# Altium PCB Left_Board.PcbDoc (part 2 of 2)
Units mm, origin at the board's own origin, x right, y up, seen from the top; angles counter-clockwise.
Board outline 34.7 x 82.01 mm, 6 copper layers (Top Layer, Layer 2, Layer 3, Layer 4, Layer 5, Bottom Layer), stack 1.538 mm thick; 59 components, 53 nets, 244 pads, 250 vias.
Unrouted connection lines stored in the file: 175.
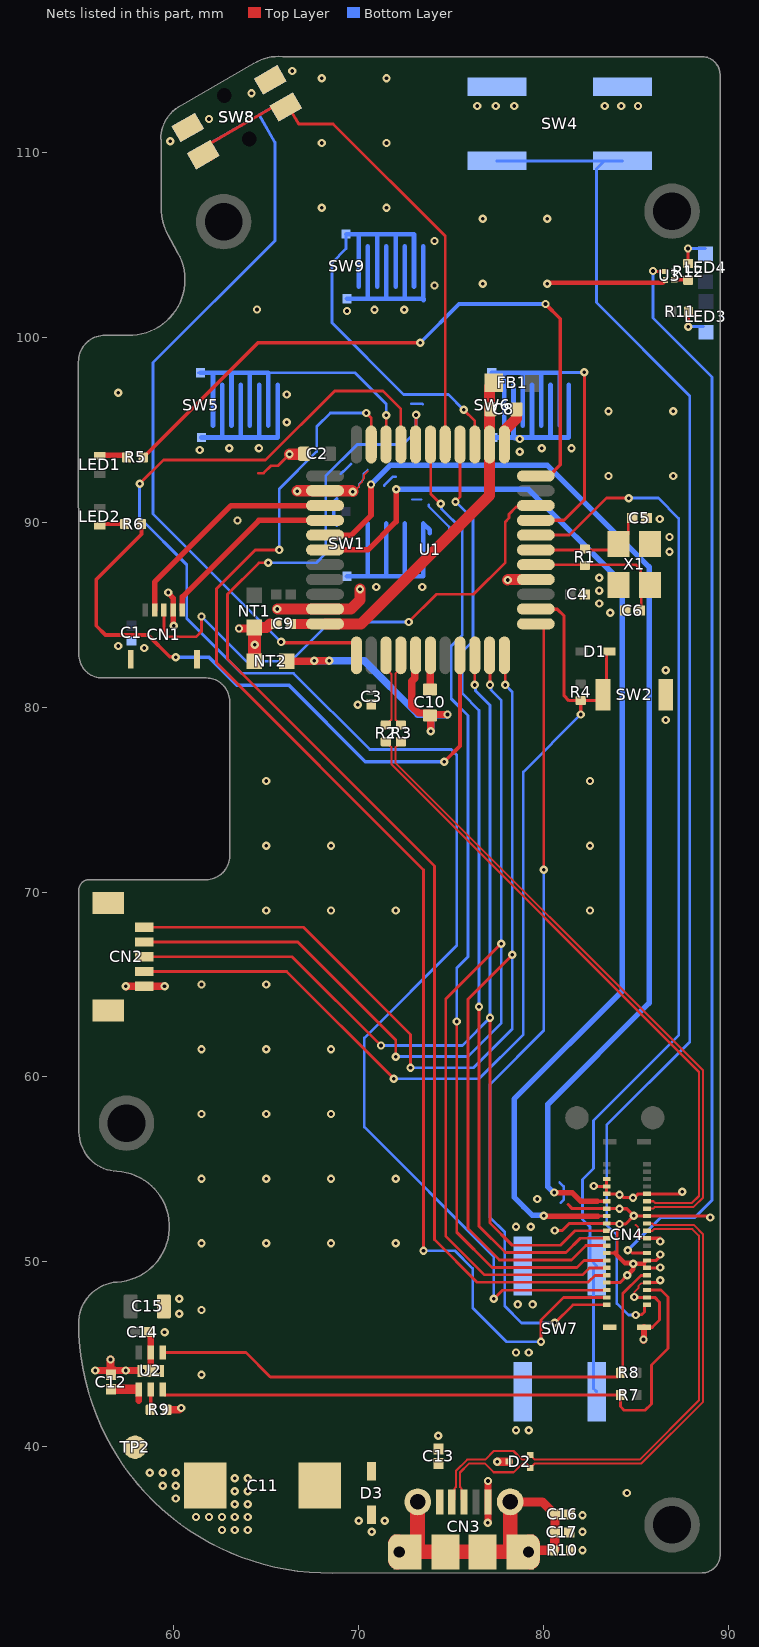
[diagram p6: the nets of this part, all layers, seen from the top]

## Via types
v1: diameter 0.45, hole 0.2, Top Layer to Bottom Layer, tented both sides, 248 vias
v2: diameter 0.45, hole 0.2, Top Layer to Bottom Layer, 2 vias

## Nets (pads, with @x,y where several pads share a name; then routed paths per layer and width w, separated by ;. In a path a pad name is that pad's centre, name@x,y a point inside that pad or via, vN(x,y) a via of type N, cw(c..) or ccw(c..) an arc to the next point about the centre after c; other vN are vias at no path point) (continued)
ATVCC: C8.1 C9.1 FB1.1 U1.24 U1.44 | length 19.8
  Top Layer w0.54: C9.1@66.35,84.5 U1.44@68.175,84.5
  Top Layer w0.6: U1.44@68.175,84.5 70.128,84.5 77.075,91.447 U1.24@77.075,94.2 77.075,96.1 77.075,97.325 FB1.1@77.3,97.55
B: SW5.1 U1.31 | length 11.1
  Top Layer w0.15: U1.31@71.475,94.2 71.487,94.213 v1(71.487,95.787)
  Bottom Layer w0.15: SW5.1@61.315,98.077 61.99,98.077 ; 62.99,98.077 63.99,98.077 ; 64.99,98.077 65.115,98.077 69.802,98.077 71.487,96.392 v1(71.487,95.787)
DOWN: CN4.32 U1.29 | length 68.7
  Top Layer w0.15: v1(65.1,87.8) 64.6,87.8 62.9,86.1 62.9,82.6 74.1,71.4 74.1,51.2 76.4,48.9 82.4,48.9 82.768,49.268 83.394,49.268 CN4.32@83.404,49.278 ; U1.29@73.075,94.2 73.1,94.225 v1(73.1,95.8)
  Bottom Layer w0.15: v1(65.1,87.8) 67.7,87.8 68.209,88.309 68.209,92.491 69.918,94.2 72.4,94.2 73.1,94.9 v1@73.1,95.724
E1_N: CN3.2 CN4.19 D2.2 | length 29
  Top Layer w0.112: CN3.2@75.038,37.021 75.182,37.165 75.182,37.752 75.258,37.828 75.258,38.699 75.866,39.307 76.832,39.307 77.3,39.775 78.365,39.775 78.833,39.307 79.09,39.307 79.156,39.373 79.156,39.441 79.265,39.55 D2.2@79.28,39.55 79.522,39.308 85.196,39.308 88.393,42.505 88.393,51.421 88.043,51.771 85.964,51.771 85.871,51.678 CN4.19@85.584,51.678
E1_P: CN3.3 CN4.17 D2.1 | length 29.4
  Top Layer w0.112: CN3.3@75.688,37.021 75.544,37.165 75.544,37.752 75.472,37.824 75.472,38.61 75.955,39.093 76.832,39.093 77.3,38.625 78.375,38.625 78.843,39.093 79.09,39.093 79.156,39.027 79.156,38.959 79.265,38.85 D2.1@79.28,38.85 79.524,39.094 85.285,39.094 88.607,42.416 88.607,51.51 88.132,51.985 85.964,51.985 85.871,52.078 CN4.17@85.584,52.078
FLT: CN4.35 R7.1 U2.3 | length 35
  Top Layer w0.15: U2.3@59.4,43.1 59.4,42.9 59.5,42.8 59.588,42.8 R7.1@84.15,42.8 84.15,42.175 84.35,41.975 85.475,41.975 85.825,42.325 85.825,44.425 86.716,45.316 86.716,48.105 86.343,48.478 CN4.35@85.584,48.478
GD0_N: R2.2 U1.3 | length 4
  Top Layer w0.112: R2.2@71.462,79.025 71.483,79.025 71.677,79.219 71.677,79.24 71.768,79.331 71.768,81.782 71.475,82.075 U1.3@71.475,82.8
GD0_P: R3.2 U1.4 | length 4
  Top Layer w0.112: U1.4@72.275,82.8 72.275,82.089 71.982,81.796 71.982,79.33 72.072,79.24 72.072,79.219 72.266,79.025 R3.2@72.287,79.025
GD_N: CN4.11 R2.1 | length 34.6
  Top Layer w0.112: R2.1@71.462,78.125 71.483,78.125 71.677,77.931 71.677,77.91 71.767,77.82 71.767,76.9 88.398,60.27 88.398,53.564 88.022,53.188 86.019,53.188 85.929,53.278 CN4.11@85.584,53.278
GD_P: CN4.13 R3.1 | length 35
  Top Layer w0.112: R3.1@72.287,78.125 72.266,78.125 72.072,77.931 72.072,77.91 71.981,77.819 71.981,76.989 88.612,60.358 88.612,53.475 88.111,52.974 86.019,52.974 85.923,52.878 CN4.13@85.584,52.878
GND: C1.2 C2.2 C3.2 C4.2 C5.2 C6.2 C8.2 C9.2 C11.2 C12.2 C13.2 C14.2 C15.2 C16.2 C17.2 CN1.4 CN1.6 CN1.7 CN2.5 CN2.6 CN2.7 CN3.5 CN4.6 CN4.8 CN4.9 CN4.10 CN4.14 CN4.15 CN4.18 CN4.21 CN4.26 CN4.27 CN4.29 CN4.33 CN4.34 CN4.37 CN4.MP3 CN4.MP4 D2.3 D3.2 NT1.2 NT2.1 R9.2 R10.2 SW1.2 SW2.1 SW3.2 SW3.4 SW4.2 SW4.3 SW5.2 SW6.2 SW7.2 SW7.3 SW8.2 SW8.4 SW9.2 U1.15 U1.23 U1.35 U1.43 U2.5 U2.7 U3.2 X1.2 X1.4 | length 83.1
  Top Layer w0.1: v1@69.828,91.792 69.866,91.792 70.026,91.952 70.026,92.04 70.077,92.091 70.093,92.091 70.188,92.186 70.188,92.27 70.279,92.361 70.279,92.546 70.49,92.757 ; v1(84.9,48.1) 84.9,48.348 85.124,48.572 85.124,48.697 85.27,48.843 85.549,48.843 CN4.33@85.584,48.878
  Top Layer w0.11: 84.969,52.003 85.109,51.863 85.109,51.453 85.264,51.298 85.515,51.298 CN4.21@85.531,51.282
  Top Layer w0.13: 83.983,50.481 83.983,51.696 84.043,51.756
  Top Layer w0.15: 64.575,92.65 64.85,92.65 65.25,93.05 65.625,93.05 v1(66.25,93.675) ; v1@86.178,48.878 v1(86.3,49)
  Top Layer w0.17: v1(80.6,51.7) 81,51.7 81.378,52.078 CN4.18@83.404,52.078 84.072,52.078 v1(84.1,52.05) 84.432,52.05 v1(84.875,52.493) 84.493,52.875 v1(84.1,52.875) 84.097,52.878 CN4.14@83.404,52.878 81.547,52.878 81.325,53.1 ; v1(82.7,54.1) 82.722,54.078 CN4.8@83.404,54.078 ; CN4.34@83.404,48.878 84.128,48.878 v1(84.525,49.275) ; CN4.26@83.404,50.478 83.847,50.478 ; CN4.6@83.404,54.478 CN4.8@83.404,54.078 ; v1@84.875,52.478 CN4.15@85.584,52.478 88.897,52.478 v1@88.975,52.4 ; v1(84.9,48.1) 84.922,48.078 86.005,48.078 86.261,47.822 86.261,46.856 85.911,46.506 ; CN4.33@85.584,48.878 v1@86.178,48.878 ; CN4.21@85.584,51.278 v1@86.325,51.278 ; 86.084,50.078 CN4.27@85.584,50.078 85.406,49.9 85.4,49.894 85.4,49.862 85.459,49.803 85.459,49.708 85.489,49.678 CN4.29@85.584,49.678 86.278,49.678 v1(86.3,49.7) ; v1@86.238,51.1 v1(86.3,51.1) ; v1@86.246,50.24 86.246,50.346 v1(86.3,50.4) ; v1(87.5,53.8) 87.378,53.678 85.104,53.678 84.901,53.475 84.326,53.475 84.176,53.625 v1(84.1,53.625) 84.047,53.678 CN4.10@83.404,53.678 CN4.8@83.404,54.078
  Top Layer w0.18: 86.084,50.078 v1@86.246,50.24
  Top Layer w0.2: CN4.MP3@85.604,46.467 85.859,46.467
  Top Layer w0.25: v1(80.2,102.9) 80.242,102.942 86.442,102.942 U3.2@86.569,103.069 ; 83.847,50.478 84.387,49.938 84.812,49.938 v1(84.85,49.9) ; v1(84.525,49.275) 84.85,49.6 v1(84.85,49.9) ; 85.406,49.9 v1(84.85,49.9)
  Top Layer w0.3: v2(59.7,86.2) 59.7,86.159 59.962,85.897 CN1.4@59.962,85.249 59.962,84.384 v2@59.976,84.37
  Top Layer w0.33: v1@85.4,45.725 85.419,45.744 CN4.MP3@85.419,46.468
  Top Layer w0.35: U2.7@58.725,44.125 58.75,44.15 U2.5@58.75,45.1 C14.2@58.75,46.25
  Top Layer w0.4: v1(55.75,44.125) 56.811,44.125 C12.2@56.816,44.13 ; 56.909,44.125 v1(57.4,44.125) 58.301,44.125 U2.7@58.313,44.113 ; v1@57.437,64.872 57.465,64.9 CN2.5@58.4,64.9 59.483,64.9 v1@59.492,64.891 ; R9.2@59.625,42 60.3,42 v1(60.4,42.1) ; v1(76.983,35.893) 76.988,35.898 76.988,38.145 v1(76.985,38.148)
  Top Layer w0.45: C12.2@56.575,44.13 v1(56.575,44.725) ; v1(63.525,84.25) NT1.2@64.25,84.25 ; NT1.2@64.3,84.25 NT1.2@64.35,84.3 ; v1@64.325,83.325 64.35,83.35 v1(64.375,83.375) ; v1(77.481,39.185) D2.3@78.105,39.185
  Top Layer w0.55: 65.2,84.5 C9.2@65.535,84.5
  Top Layer w0.6: NT1.2@64.35,84.3 65,84.3 65.2,84.5 ; v1(65.6,85.3) 69.579,85.3 70.065,85.786 v1(70.065,86.379) ; v1(66.25,93.675) 67.025,93.675 C2.2@67.05,93.7 ; v1(66.675,91.675) 66.7,91.7 U1.35@68.175,91.7 69.625,91.7 v1(69.675,91.65) ; U1.23@77.875,94.2 77.875,94.95 78.525,95.6 C8.2@78.525,96.1 ; v1(78.05,86.875) 78.075,86.9 U1.15@79.575,86.9
  Top Layer w0.7: NT2.1@64.35,82.475 v1@64.35,83.35 ; v1@64.35,83.375 NT1.2@64.35,84.3
  Bottom Layer w0.1: 70.022,91.911 70.022,92.07 70.246,92.294 70.246,92.607 70.482,92.843
  Bottom Layer w0.13: 69.02,92.61 69.144,92.734 69.163,92.734 ; 71.369,91.98 71.823,92.434 71.835,92.447 72.015,92.447 ; 72.842,96.414 73.431,96.414 73.467,96.378 ; 72.884,91.225 73.393,91.225 ; 73.782,90.956 73.782,90.85 74.889,89.743 ; 74.892,89.233 74.892,89.726 ; 80.856,54.3 81.074,54.082 81.074,53.351 80.916,53.193
  Bottom Layer w0.15: 69.167,92.739 69.573,93.145
  Bottom Layer w0.2: 68.804,89.829 68.652,89.981 68.652,91.099 68.804,91.251
  Bottom Layer w0.25: 73.49,89.928 73.837,89.581 73.837,89.404
  other v1: 82.1,34.4 70.7,35.4 82.1,35.4 62.6,35.5 63.3,35.5 64,35.5 70,36 71.4,36 61.2,36.2 61.9,36.2 62.6,36.2 63.3,36.2 64,36.2 82.1,36.3 63.3,36.9 64,36.9 60.1,37.2 84.5,37.5 63.3,37.6 64,37.6 59.4,37.9 60.1,37.9 63.3,38.3 64,38.3 58.7,38.6 59.4,38.6 60.1,38.6 74.3,40.6 78.5,40.9 79.2,40.9 61.5,43.9 58.35,44.1 59.15,44.1 78.5,45.1 79.2,45.1 85.4,45.8 59.5,46.2 60.3,47.2 61.5,47.4 78.6,47.7 79.4,47.7 60.3,48 61.5,51 65,51 68.5,51 72,51 78.5,51.9 79.3,51.9 89,52.4 79.65,53.4 84.825,53.475 61.5,54.5 65,54.5 68.5,54.5 72,54.5 61.5,58 65,58 68.5,58 61.5,61.5 65,61.5 68.5,61.5 57.4,64.9 59.5,64.9 61.5,65 65,65 65,69 68.5,69 72,69 82.5,69 65,72.5 68.5,72.5 82.5,72.5 65,76 82.5,76 86.6,79.3 69.95,80.125 86.6,82 58.4,83.2 57,83.3 83.6,85.1 83,85.6 83,86.3 70.944,86.492 73.426,86.492 83,87 86.8,88.4 86.8,89.2 63.446,90.092 86.275,90.175 83.5,92.5 87,92.5 78.7,93.8 61.4,93.9 63,94 64.6,94 79.9,94 81.5,94 78.7,94.5 66.1,95.4 83.5,96 87,96 66.1,96.9 57,97 69.364,101.417 64.5,101.5 70.854,101.492 72.454,101.492 74.1,102.8 76.7,102.9 74.1,105.2 76.7,106.4 80.2,106.4 68,107 71.5,107 68,110.5 71.5,110.5 59.8,110.6 61.9,111.8 76.4,112.5 77.4,112.5 78.4,112.5 83.3,112.5 84.2,112.5 85.1,112.5 64.2,113.2 68,114 71.5,114 66.4,114.4
  other v2: 60,84.4
GR1: SW3.1 SW3.3 U1.1 | length 46
  Top Layer w0.17: v1(65.8,83.525) 65.842,83.483 69.676,83.483 69.875,83.284 U1.1@69.875,82.8
  Bottom Layer w0.15: SW3.1@61.596,109.872 61.55,109.919 61.55,110.247 63.652,111.461 64.617,112.018 ; SW3.1@61.658,109.815 61.834,109.917 SW3.1@62.09,110.065 ; SW3.1@61.985,109.656 SW3.1@62.093,110.06 ; v1(65.8,83.525) 58.875,90.45 58.875,98.625 65.467,105.217 65.467,110.545 64.617,112.018 ; SW3.3@66.028,112.343 SW3.3@66.056,112.447 65.581,112.575 64.678,112.053 64.617,112.018 ; SW3.3@66.041,112.34 SW3.3@66.445,112.231
GR2: SW8.1 SW8.3 U1.27 | length 28.4
  Top Layer w0.15: SW8.1@66.056,112.126 SW8.1@66.056,112.448 ; SW8.1@66.295,112.31 66.745,111.53 68.617,111.53 74.675,105.472 U1.27@74.675,94.2
  Top Layer w0.17: SW8.3@61.596,109.873 61.723,110.347 65.582,112.575 SW8.1@66.056,112.448 ; SW8.3@61.985,109.657 SW8.3@62.022,109.62
GR3: CN1.3 U1.20 | length 28.2
  Top Layer w0.15: CN1.3@59.462,85.249 59.462,84.038 59.7,83.8 61.2,83.8 61.5,84.1 v1(61.5,84.9) ; v1(72.7,84.6) 74.2,86.1 76.2,86.1 77.925,87.825 77.925,90.024 78.125,90.224 78.125,90.429 78.51,90.814 79.489,90.814 U1.20@79.575,90.9
  Bottom Layer w0.15: v1(61.5,84.9) 63.925,82.475 66.318,82.475 68.443,84.6 v1(72.7,84.6)
GXTAL1: C5.1 R1.1 U1.17 X1.1 | length 6.2
  Top Layer w0.15: U1.17@79.575,88.5 84.05,88.5 X1.1@84.075,88.475 ; X1.1@84.05,88.85 X1.1@84.575,89.375 ; X1.1@84.575,89.347 C5.1@84.575,90.027 ; C5.1@84.575,90.055 84.77,90.25 C5.1@84.79,90.25
GXTAL2: C6.1 R1.2 U1.16 X1.3 | length 8.3
  Top Layer w0.15: U1.16@79.575,87.7 85,87.7 85.244,87.456 85.244,87.236 85.73,86.75 X1.3@85.75,86.75 ; C6.1@85.275,85.222 X1.3@85.275,86.147 ; X1.3@85.275,86.175 X1.3@85.75,86.65
HK/MISO: CN2.1 CN4.24 U1.11 | length 69.7
  Top Layer w0.15: CN2.1@58.4,68.1 67,68.1 72.8,62.3 v1(72.8,60.5) ; U1.11@77.875,82.8 77.925,82.75 v1(77.925,81.2) ; v1(78.3,66.6) 75.9,64.2 75.9,51.8 77.6,50.1 81.5,50.1 82.278,50.878 CN4.24@83.404,50.878
  Bottom Layer w0.15: v1(72.8,60.5) 76.2,60.5 78.3,62.6 v1(78.3,66.6) 78.3,80.825 v1(77.925,81.2)
L1/SCK: CN2.3 CN4.20 U1.9 | length 59.5
  Top Layer w0.15: CN2.3@58.4,66.5 66.4,66.5 v1(71.2,61.7) ; v1(76.275,81.2) U1.9@76.275,82.8 ; v1(77.1,63.2) 77.1,52.1 78.3,50.9 80.9,50.9 81.678,51.678 CN4.20@83.404,51.678
  Bottom Layer w0.15: v1(71.2,61.7) 75.6,61.7 v1(77.1,63.2) 77.1,80.1 76.318,80.882 76.318,81.182 v1@76.3,81.2
L2: CN4.38 U1.32 | length 71.9
  Top Layer w0.15: v1(65.7,88.5) 64.4,88.5 62.3,86.4 62.3,82.4 73.5,71.2 v1(73.5,50.6) ; v1(70.4,95.9) 70.675,95.625 U1.32@70.675,94.2 ; v1(79.852,45.677) 79.852,46.852 81.078,48.078 CN4.38@83.404,48.078
  Bottom Layer w0.15: v1(65.7,88.5) 65.7,91.791 67.725,93.816 67.725,95.161 68.464,95.9 v1(70.4,95.9) ; v1(73.5,50.6) 75.2,50.6 76.158,49.642 76.158,47.52 78.001,45.677 v1(79.852,45.677)
L3/MOSI: CN2.2 CN4.30 U1.10 | length 70.1
  Top Layer w0.15: CN2.2@58.4,67.3 66.7,67.3 72,62 v1(72,61.1) ; U1.10@77.075,82.8 77.1,82.775 v1(77.1,81.2) ; v1(77.7,67.2) 74.7,64.2 74.7,51.4 76.8,49.3 82.1,49.3 82.468,49.668 83.394,49.668 CN4.30@83.404,49.678
  Bottom Layer w0.15: v1(72,61.1) 75.9,61.1 77.7,62.9 v1(77.7,67.2) 77.7,80.375 77.156,80.919 77.156,81.144 v1(77.1,81.2)
LEFT: CN4.36 U1.30 | length 85.2
  Top Layer w0.15: v1(58.15,92.075) 59.436,93.361 64.961,93.361 68.7,97.1 71.3,97.1 72.275,96.125 U1.30@72.275,94.2 ; v1(77.3,48) 77.768,48.468 83.394,48.468 CN4.36@83.404,48.478
  Bottom Layer w0.15: v1(58.15,92.075) 58.15,90.25 60.7,87.7 60.7,84.8 63.675,81.825 66.475,81.825 70.6,77.7 75,77.7 75.3,77.4 75.3,67.112 70.3,62.112 70.3,57.3 77.3,50.3 v1(77.3,48)
LX: CN4.16 U1.39 | length 61.6
  Top Layer w0.17: 82.922,52.478 CN4.16@83.404,52.478
  Top Layer w0.3: U1.39@68.175,88.5 70.5,88.5 72.025,90.025 v1(72.025,91.788) ; v1(80,52.5) 80.022,52.478 82.922,52.478
  Bottom Layer w0.3: v1(72.025,91.788) 79.162,91.788 84.25,86.7 84.25,64.65 78.4,58.8 78.4,53.5 78.936,52.964 79.371,52.529 79.971,52.529 v1(80,52.5)
LY: CN4.12 U1.38 | length 61.6
  Top Layer w0.17: 82.95,53.275 82.953,53.278 CN4.12@83.404,53.278
  Top Layer w0.3: U1.38@68.175,89.3 69.6,89.3 70.663,90.363 v1(70.663,92.038) ; v1(80.575,53.75) 81.533,53.75 82.008,53.275 82.9,53.275
  Bottom Layer w0.3: v1(70.663,92.038) 71.7,93.075 80.2,93.075 85.7,87.575 85.7,64 80.225,58.525 80.225,54.059 80.534,53.75 v1(80.575,53.75)
NetLED1_2: LED1.2 R5.2 | length 1.5
  Top Layer w0.3: LED1.2@56,93.611 57.339,93.611 R5.2@57.45,93.5
NetLED2_2: LED2.2 R6.2 | length 1.3
  Top Layer w0.2: LED2.2@56.1,89.8 56.2,89.9 R6.2@57.35,89.9
NetLED3_2: LED3.2 R11.2 | length 1.6
  Top Layer w0.15: R11.2@87.8,101.35 R11.2@87.825,101.375
  Top Layer w0.17: v1(87.825,100.575) R11.2@87.825,101.375
  Bottom Layer w0.17: v1(87.825,100.575) LED3.2@88.625,100.575
NetLED4_2: LED4.2 R12.2 | length 1.8
  Top Layer w0.17: v1(87.8,104.8) 87.805,104.795 87.805,103.99 R12.2@87.81,103.985
  Bottom Layer w0.17: v1(87.8,104.8) LED4.2@88.75,104.8
NetR5_1: R5.1 U1.22 | length 35.8
  Top Layer w0.2: R5.1@58.35,93.5 64.55,99.7 v1(73.325,99.7) ; U1.22@79.575,92.5 80.3,92.5 80.9,93.1 80.9,101 v1(80.1,101.8)
  Bottom Layer w0.2: v1(73.325,99.7) 75.425,101.8 v1(80.1,101.8)
NetR6_1: R6.1 U1.8 | length 34.5
  Top Layer w0.2: R6.1@58.25,89.9 58.25,89.35 55.8,86.9 55.8,84.4 56.3,83.9 58.6,83.9 59.775,82.725 60.075,82.725 v1(60.1,82.7) ; v1(74.625,77.05) 75.475,77.9 U1.8@75.475,82.8
  Bottom Layer w0.2: v1(60.1,82.7) 61.9,82.7 63.411,81.189 66.211,81.189 70.35,77.05 v1(74.625,77.05)
NetR9_1: R9.1 U2.2 | length 1.1
  Top Layer w0.175: R9.1@58.725,42 58.75,42.025 U2.2@58.75,43.1
NetR12_1: R12.1 U3.3 | length 0.8
  Top Layer w0.17: U3.3@87.06,103.11 87.785,103.11 R12.1@87.81,103.085
PORT_EN: CN4.31 R8.2 U2.4 | length 31.5
  Top Layer w0.15: R8.2@84.275,44 84.275,48.283 85.26,49.268 85.584,49.268 CN4.31@85.584,49.278
  Top Layer w0.17: U2.4@59.4,45.1 63.9,45.1 65.223,43.777 84.15,43.777 R8.2@84.15,44
PWR: CN4.25 U3.1 | length 59
  Top Layer w0.17: v1(84.55,50.625) 84.631,50.625 84.778,50.478 CN4.25@85.584,50.478 ; v1(85.91,103.585) 85.935,103.56 U3.1@86.56,103.56
  Bottom Layer w0.17: v1(84.55,50.625) 86.325,52.4 88.168,52.4 89.1,53.332 89.1,96.5 89.1,97.85 85.91,101.04 v1(85.91,103.585)
RESET_G: CN2.4 D1.2 R4.2 SW2.2 U1.13 | length 54.1
  Top Layer w0.15: CN2.4@58.4,65.7 66.1,65.7 v1(71.9,59.9)
  Top Layer w0.175: U1.13@79.575,85.3 79.585,85.29 80.735,85.29 81.1,84.925 81.1,80.615 81.365,80.35 R4.2@82,80.35 ; v1(82,79.6) 82.005,79.605 82.005,80.345 R4.2@82,80.35 ; D1.2@83.55,83 83.522,83 83.4,82.877 83.4,80.875 82.875,80.35 R4.2@82,80.35
  Bottom Layer w0.15: v1(71.9,59.9) 76.5,59.9 78.9,62.3 78.9,76.5 v1(82,79.6)
RIGHT: CN4.40 U1.12 | length 45
  Top Layer w0.15: U1.12@79.575,84.5 79.792,84.5 80,84.292 v1(80,71.2) ; v1(80.6,46.7) 81.578,47.678 CN4.40@83.404,47.678
  Bottom Layer w0.15: v1(80,71.2) 80,62.5 77.1,59.6 77.1,52.4 77.9,51.6 77.9,47.6 78.8,46.7 v1(80.6,46.7)
RX: CN1.5 U1.37 | length 10.1
  Top Layer w0.3: CN1.5@60.462,85.249 60.462,85.962 64.6,90.1 U1.37@68.175,90.1
RY: CN1.2 U1.36 | length 12.4
  Top Layer w0.3: CN1.2@58.962,85.249 58.962,86.762 63.1,90.9 U1.36@68.175,90.9
SELECT: CN4.22 U1.26 | length 51.2
  Top Layer w0.15: v1(75.227,91.109) 75.475,91.357 U1.26@75.475,94.225 ; v1(76.5,63.8) 76.5,51.925 77.925,50.5 81.2,50.5 81.978,51.278 CN4.22@83.404,51.278
  Bottom Layer w0.15: v1(75.227,91.109) 76.175,90.161 76.175,83.575 75.6,83 75.6,80.725 76.5,79.825 v1(76.5,63.8)
SGND: C16.1 C17.1 CN3.6 CN3.7 CN3.8 CN3.9 CN3.10 CN3.11 R10.1 | length 18.6
  Top Layer w0.5: CN3.7@78.188,37.021 79.919,37.021 80.59,36.35 C16.1@80.61,36.35 80.605,36.345 80.605,35.38 C17.1@80.6,35.375 80.6,34.475 80.55,34.425 R10.1@80.55,34.4 79.238,34.4 79.234,34.396 CN3.11@79.234,34.115
  Top Layer w0.8: CN3.8@72.638,34.521 CN3.8@72.638,34.321 CN3.8@73.174,34.321 ; CN3.6@73.188,37.021 73.174,37.007 CN3.8@73.174,34.321 ; CN3.7@78.188,37.021 CN3.7@78.195,37.014 ; CN3.11@78.196,34.43 CN3.7@78.196,36.93 ; CN3.11@78.738,34.521 CN3.11@78.738,34.321 ; CN3.11@79.234,34.115 79.028,34.321 CN3.11@78.738,34.321 ; CN3.8@73.174,34.321 CN3.11@78.738,34.321
START: SW7.1 SW7.4 U1.18 | length 58.8
  Top Layer w0.15: U1.18@79.575,89.3 81.4,89.3 83.4,91.3 v1(84.6,91.3)
  Bottom Layer w0.15: SW7.1@82.867,42.978 82.7,43.145 82.7,49.611 SW7.4@82.867,49.778 82.5,50.145 82.5,51.9 82.1,52.3 82.1,54.45 82.7,55.05 82.7,57.65 87.3,62.25 87.3,90.2 86.2,91.3 v1(84.6,91.3)
SYS: CN4.39 SW4.1 SW4.4 | length 75.4
  Top Layer w0.15: v1(84.975,47.125) 84.993,47.143 85.293,47.143 85.449,47.299 85.449,47.638 85.489,47.678 CN4.39@85.584,47.678
  Bottom Layer w0.15: SW4.1@77.467,109.535 SW4.4@83.425,109.535 ; SW4.4@84.267,109.535 83.525,109.535 SW4.4@83.425,109.535 ; v1(84.975,47.125) 84.581,47.125 83.955,47.751 83.955,51.445 83.404,51.996 83.404,57.404 87.9,61.9 87.9,96.825 82.85,101.875 82.85,109.11 83.275,109.535 SW4.4@83.425,109.535
UCAP: C10.1 U1.6 | length 1.8
  Top Layer w0.4: C10.1@73.825,81.05 73.875,81.1 U1.6@73.875,82.8
UGND: C10.2 NT2.2 U1.5 | length 17.9
  Top Layer w0.4: NT2.2@66.1,82.475 v1@67.7,82.475 ; v1@67.7,82.5 v1@68.3,82.5 ; U1.5@73.075,82.8 73.037,82.762 73.037,81.562 72.875,81.4 72.875,80.05 73.245,79.68 C10.2@73.795,79.68 ; v1@73.9,78.8 73.9,79.5 C10.2@73.85,79.55 73.9,79.6 v1@74.786,79.6
  Bottom Layer w0.4: v1@67.7,82.5 v1(68.4,82.5) 70.3,82.5 73.2,79.6 v1(74.8,79.6) 74.79,79.59 73.99,79.59 73.9,79.5 v1(73.9,78.7)
  other v1: 67.6,82.5
UP: CN4.28 U1.28 | length 53.3
  Top Layer w0.15: U1.28@73.888,94.288 73.888,91.536 v1(74.429,90.995) ; v1(75.3,63) 75.3,51.6 77.2,49.7 81.8,49.7 82.178,50.078 CN4.28@83.404,50.078
  Bottom Layer w0.15: v1(74.429,90.995) 74.479,90.945 74.479,90.709 75.6,89.588 75.6,83.9 75,83.3 75,80.45 75.9,79.55 75.9,66.5 75.3,65.9 v1(75.3,63)
VBUS2: C11.1 C12.1 C13.1 CN3.1 D3.1 TP2.1 U2.1 | length 2
  Top Layer w0.35: 58.1,42.5 U2.1@58.1,43.1
  Top Layer w0.5: C12.1@56.6,43.11 U2.1@57.985,43.11
X: SW6.1 U1.19 | length 11.4
  Top Layer w0.17: U1.19@79.55,90.075 U1.19@79.575,90.1 81.1,90.1 82.2,91.2 v1(82.2,98.1)
  Bottom Layer w0.15: SW6.1@77.3,98.062 SW6.1@77.315,98.077
  Bottom Layer w0.17: 80.865,98.1 v1(82.2,98.1)
Y: SW9.1 U1.25 | length 16.3
  Top Layer w0.15: v1(75.675,96.075) 76.275,95.475 U1.25@76.275,94.2
  Bottom Layer w0.15: SW9.1@69.315,105.578 69.315,104.79 68.55,104.025 68.55,100.783 72.426,96.907 74.843,96.907 v1(75.675,96.075)
pads on no net: CN3.4 SW3.MH1 SW3.MH2 U1.33 U1.40 U1.41

## Polygon pours and split planes (outlines as drawn)
GND on Top Layer "GND_L01_P019" (solid, remove dead copper, pour order 19): 104,119 54,119 53,118 53,32 54,31 104,31 105,32 105,118
VBUS2 on Top Layer "VBUS2_L01_P003" (solid, pour order 3): 56.278,43.4 56.278,39.2 58.6,39.2 66.6,39.2 66.7,39.1 66.7,36.5 66.8,36.4 70,36.4 70.1,36.5 70.1,38 70.2,38.1 73.9,38.1 74.1,37.9 74.1,36.3 74.6,36.3 74.6,39.4 73.8,39.4 73.7,39.5 73.7,40.8 72.9,41.6 58.4,41.6 58.3,41.7 58.3,43.4
+5V on Top Layer "+5V_L01_P011" (solid, pour order 11): 58,48.2 55.7,48.2 55.6,48.1 55.6,45.425 56.325,44.7 58.3,44.7 58.3,46.5 58,46.8
+5V on Top Layer "+5V_L01_P014" (solid, pour order 14): 78.3,100.3 78.2,100.2 78.2,98.9 78.3,98.8 78.716,98.8 78.8,98.716 78.8,97.55 79.8,97.55 79.8,100.2 79.7,100.3
+3V3 on Top Layer "+3V3_L01_P009" (solid, pour order 9): 81.2,58.7 81,58.5 81,54.9 81.1,54.8 83.6,54.8 83.6,55.5 83.5,55.6 82.7,55.6 82.6,55.7 82.6,58.5 82.4,58.7
+5V on Top Layer "+5V_L01_P006" (solid, pour order 6): 84.575,58.875 84.39,58.69 84.4,54.1 84.5,54 87,54 87.3,54.3 87.3,58.7 87.125,58.875
+3V3 on Top Layer "+3V3_L01_P000" (solid, pour order 0): 58.6,86.3 56.7,86.3 56.7,84.8 58.6,84.8
GND on Bottom Layer "GND_L06_P018" (solid, remove dead copper, pour order 18): 92,119 42,119 41,118 41,32 42,31 92,31 93,32 93,118
+3V3 on Bottom Layer "+3V3_L06_P001" (solid, pour order 1): 58.2,86.3 56.7,86.3 56.7,84.1 58.2,84.1
+3V3 on Layer 3 "+3V3_L03_P013" (solid, remove dead copper, pour order 13): 90,119 40,119 39,118 39,32 40,31 90,31 91,32 91,118
+5V on Layer 3 "+5V_L03_P012" (solid, pour order 12): 52.9,48.2 84.4,48.2 84.4,57.5 84.2,57.7 71.1,57.7 69,59.8 69,90.8 67.6,92.2 67.6,99.5 68.6,100.5 82.5,100.5 86.4,96.6 91.2,96.6 92.3,95.5 92.3,31.3 52.9,31.3
GND on Layer 4 "GND_L04_P015" (solid, remove dead copper, pour order 15): 98,119 48,119 47,118 47,32 48,31 98,31 99,32 99,118
GND on Layer 2 "GND_L02_P016" (solid, remove dead copper, pour order 16): 101,119 51,119 50,118 50,32 51,31 101,31 102,32 102,118
GND on Layer 5 "GND_L05_P017" (solid, remove dead copper, pour order 17): 95,119 45,119 44,118 44,32 45,31 95,31 96,32 96,118

## Other copper
Top Layer:
  pour cut-out: 63.6,86 63.5,86.1 63.4,86.1 63.3,86 63.3,82.8 63.5,82.6 65.1,82.6 65.4,82.9 65.4,83.7 65.7,84 65.7,85.5 63.8,85.5 63.6,85.7

## Silkscreen, mask and mechanical layers (free items; w line width, h text height)
Top Overlay:
  lines w0.15: 60.119,40.462 60.119,53.462 80.119,53.462 80.119,40.462 60.119,40.462
Mechanical 1:
  circle w0.15: c86.94,106.818 r2
Board Outline:
  lines w0.15: 54.841,46.652 ccw(c68.387,46.72) 68.57,33.174 88.575,33.176 ; 54.845,46.652 cw(c57.081,46.677) 56.924,48.908 ; 54.852,70.099 cw(c55.429,70.093) 55.435,70.67 61.742,70.67 ccw(c61.742,71.94) 63.012,71.94 ; 54.853,70.099 54.867,57.023 ; 54.864,82.846 ccw(c56.134,82.846) 56.134,81.576 61.77,81.576 cw(c61.77,80.358) 62.988,80.358 63.016,71.941 ; 54.87,82.846 54.84,98.672 cw(c56.278,98.672) 56.278,100.11 57.514,100.11 ; 54.871,57.02 ccw(c57.007,57.032) 56.922,54.898 ; 56.918,54.899 cw(c56.761,51.903) 56.927,48.908 ; 57.514,100.111 ccw(c57.598,103.11) 60.221,104.566 59.838,105.255 ; 59.301,110.694 cw(c61.319,110.741) 60.25,112.453 64.321,114.804 cw(c65.655,112.666) 65.879,115.176 68.26,115.177 88.597,115.177 cw(c88.541,114.179) 89.54,114.216 89.54,34.121 cw(c88.542,34.177) 88.579,33.178 ; 59.307,110.693 59.307,107.087 ccw(c62.628,107.053) 59.836,105.254

## Dimensions
56,92.6 to 57.44,57.5 on Mechanical 13
71.49,89.928 to 64.115,95.221 on Mechanical 1
69.365,102.078 to 69.365,87.078 on Mechanical 1
65.615,97.428 to 81.365,97.428 on Mechanical 1
86.94,106.818 to 86.94,35.776 on Mechanical 13
88.775,101.1 to 57.44,57.5 on Mechanical 13
88.75,103 to 88.75,104.5 on Mechanical 13
88.775,101.1 to 88.75,103 on Mechanical 13
88.775,101.1 to 57.44,57.5 on Mechanical 13
56,89.8 to 57.44,57.5 on Mechanical 13
56,89.8 to 57.44,57.5 on Mechanical 13
57.44,57.5 to 88.75,103.75 on Mechanical 13
88.75,103.75 to 57.44,57.5 on Mechanical 13
65.206,113.92 to 54.84,98.672 on Mechanical 13
65.206,113.92 to 65.655,115.186 on Mechanical 13
54.84,98.672 to 86.94,35.776 on Mechanical 13
62.691,106.248 to 86.94,106.818 on Mechanical 13
54.84,98.672 to 86.94,106.818 on Mechanical 13
57.44,57.5 to 100.203,33.176 on Mechanical 13
62.691,106.248 to 57.44,57.5 on Mechanical 13
86.94,35.776 to 88.575,33.176 on Mechanical 13
56.918,54.899 to 57.44,57.5 on Mechanical 13
57.44,57.5 to 54.84,98.672 on Mechanical 13
62.691,106.248 to 56.278,100.11 on Mechanical 13
54.84,98.672 to 62.691,106.248 on Mechanical 13
89.54,114.216 to 86.94,35.776 on Mechanical 13
88.579,33.178 to 86.94,106.818 on Mechanical 13
89.54,114.216 to 86.94,106.818 on Mechanical 13
88.597,115.177 to 86.94,106.818 on Mechanical 13
85.45,101.975 to 85.325,100.975 on Mechanical 13
89.54,114.216 to 86.525,75.025 on Mechanical 13
59.462,85.249 to 56.134,81.576 on Mechanical 13
59.462,85.249 to 54.84,98.672 on Mechanical 13
80.867,111.535 to 80.867,46.378 on Mechanical 13
80.867,46.378 to 80.867,111.535 on Mechanical 13
84.494,51.478 to 88.579,33.178 on Mechanical 13
84.494,51.478 to 54.84,98.672 on Mechanical 13
80.867,46.378 to 88.579,33.178 on Mechanical 13
80.867,46.378 to 54.867,57.023 on Mechanical 13
65.206,113.92 to 54.84,98.672 on Mechanical 13
65.206,113.92 to 65.879,115.176 on Mechanical 13
75.406,88.328 to 88.579,33.178 on Mechanical 13
65.369,49.204 to 54.84,98.672 on Mechanical 13
52.247,103.11 to 51.462,81.575 on Mechanical 13
56.278,100.11 to 55.877,103.11 on Mechanical 13
89.54,114.216 to 54.84,98.672 on Mechanical 13
57.514,100.11 to 57.424,103.11 on Mechanical 13

## Text inside footprints (layer, text, board x,y; h text height)
CN3: Mechanical 1 "PCB EDGE" at 68.488,32.771 h0.3